# Altium PCB BeagleBone_Black_RevB4_V1.PcbDoc (part 2 of 2)
Units mm, origin at the board's own origin, x right, y up, seen from the top; angles counter-clockwise.
Board outline 100 x 101.6 mm, 4 copper layers (Top Layer, Layer 1, Layer 2, Bottom Layer), stack 0.603 mm thick; 71 components, 245 nets, 903 pads, 74 vias.
Unrouted connection lines stored in the file: 485.
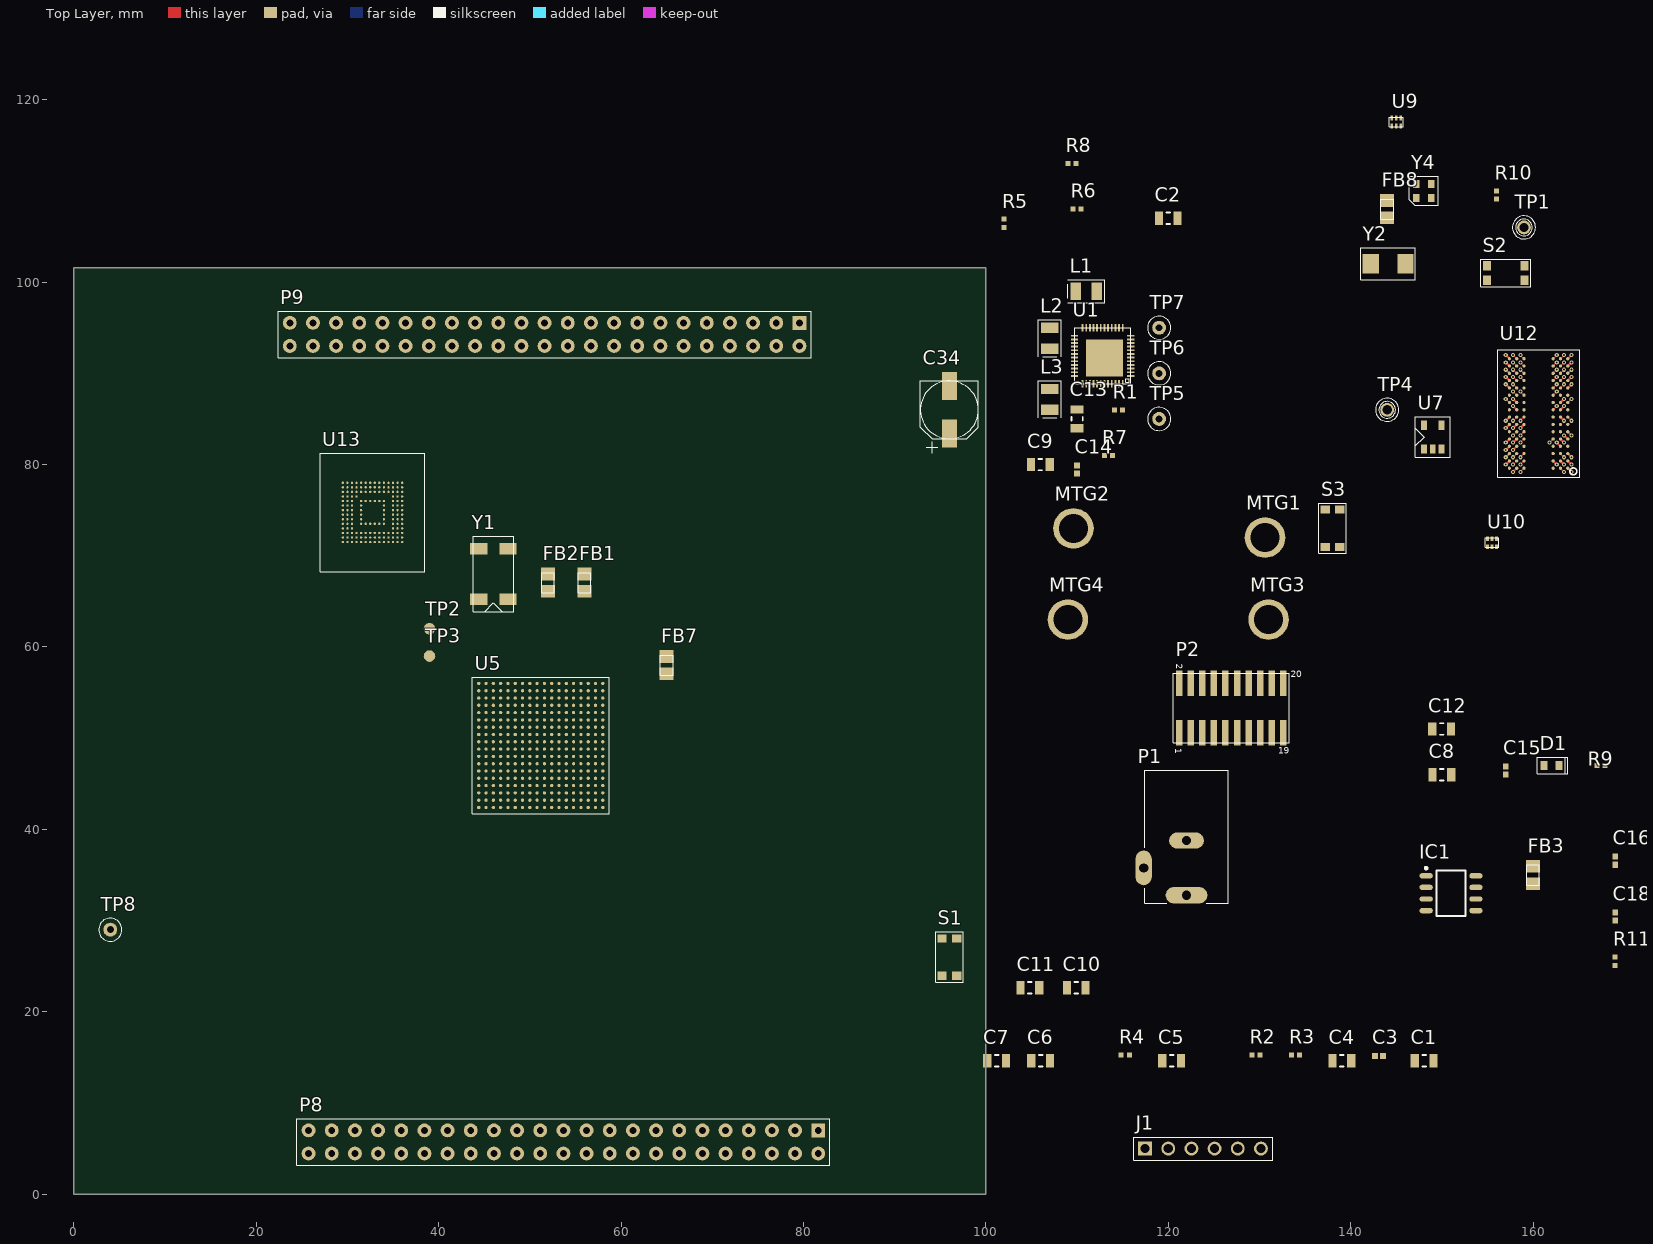
[diagram p0: Top Layer view]

## Part data (continued)
U1: library part PWR_TPS65217_2, "IC PMIC BATT PWR SYST 48VQFN", Current - Supply=-, Manufacturer="Texas Instruments", Manufacturer Part Number=TPS65217CRSLR, Operating Temperature="-40°C ~ 105°C", Package / Case="48-VFQFN Exposed Pad", Supplier Device Package="48-VQFN-EP (6x6)", Supplier Part Number 1=296-34814-6-ND, Voltage - Supply="2.75 V ~ 5.8 V", Applications="Battery Management, Display (LED Drivers), Handheld/Mobile Devices, Power Supply", Category="Integrated Circuits (ICs)", ComponentLink1Description=http://www.ti.com/lit/ds/symlink/tps65217c.pdf, ComponentLink1URL=http://www.ti.com/lit/ds/symlink/tps65217c.pdf, Mounting Type="Surface Mount", Packaging=Digi-Reel®, Pricing 1="1=8.01, 10=7.204, 25=6.5516, 100=4.1918, 250=4.11412, 500=4.0365, 750=3.95888 (USD)", RoHS="RoHS Compliant", Stock 1=0, Supplier 1=Digi-Key
U5: "SubArctic Cortex A8 Processor 15x15", Manufacturer="Texas Instruments", Manufacturer Part Number=XAM3359ZCZ, Mfr=TI, MfrNum="AM335x 15x15 FBGA ZCE", Package / Case=324-LFBGA, PartName=AM335X_15x15, Part Number=IC_AM335x_ZCE, Supplier Device Package=324-NFBGA(15x15), Supplier Part Number 1=296-35073-ND, TIIntPartnumber=1A0242, Voltage="1.06 V ~ 1.15 V", Category="Integrated Circuits (ICs)", ComponentLink1Description=http://www.ti.com/lit/ds/symlink/am3354.pdf, ComponentLink1URL=http://www.ti.com/lit/ds/symlink/am3354.pdf, Cost10K=10.00, Cost100=10.00, Features=-, Mounting Type="Surface Mount", Packaging=Tray, Pricing 1="1=33.5, 10=30.988, 100=26.465, 250=24.28752, 500=23.115, 1000=21.775, 2500=21.105, 5000=20.6025, 10000=20.1 (USD)", Processor Type="ARM Microprocessor", RoHS="RoHS Compliant", Speed=-, Stock 1=16, Supplier 1=Digi-Key, Vendor=Arrow
U7: "IC EEPROM 32KBIT 400KHZ SOT23-5", Manufacturer="Microchip Technology", Manufacturer Part Number=24LC32AT-I/OT, Operating Temperature="-40°C ~ 85°C", Package / Case="SC-74A, SOT-753", Supplier Device Package=SOT-23-5, Supplier Part Number 1=24LC32AT-I/OTDKR-ND, Voltage - Supply="2.5 V ~ 5.5 V", Category="Integrated Circuits (ICs)", ComponentLink1Description=http://ww1.microchip.com/downloads/en/DeviceDoc/21713M.pdf, ComponentLink1URL=http://ww1.microchip.com/downloads/en/DeviceDoc/21713M.pdf, Format - Memory="EEPROMs - Serial", Interface="I²C, 2-Wire Serial", Memory Size="32K (4K x 8)", Memory Type=EEPROM, Packaging=Digi-Reel®, Pricing 1="1=0.5, 10=0.32, 25=0.31, 100=0.3 (USD)", RoHS="RoHS Compliant", Speed=400kHz, Stock 1=8694, Supplier 1=Digi-Key
U9 U10: library part PROT_TPD4S012, "ESD 4channel USB Interface", Manufacturer="Texas Instruments", Manufacturer Part Number=TPD4S012DRYR, Mfr=TI, MfrNum=TPD4S012DRY, Package / Case=6-UFDFN, Power (Watts)=60W, Supplier Device Package="6-SON (1.45x1)", Supplier Part Number 1=296-24244-6-ND, TIIntPartnumber=1A0233, Voltage - Clamping=-, Applications=USB, Category="Circuit Protection", ComponentLink1Description=http://www.ti.com/lit/ds/symlink/tpd4s012.pdf, ComponentLink1URL=http://www.ti.com/lit/ds/symlink/tpd4s012.pdf, Cost10K=0.23, Cost100=0.76, Number of Circuits=4, Packaging=Digi-Reel®, PartName=TPD4S012, Pricing 1="1=0.78, 10=0.682, 25=0.6028, 100=0.2552, 250=0.25044, 500=0.2457, 750=0.24097 (USD)", RoHS="RoHS Compliant", Stock 1=7978, Supplier 1=Digi-Key, Technology="Mixed Technology", Vendor=Digikey, Voltage - Working=-
U12: library part MT41K256M16HA, "DDR2 SDRAM 2Gb (256Mx8)", Manufacturer="Micron Technology", Manufacturer Part Number=MT41K256M16HA-125:E, Package Quantity=1, Peak Solder Temperature="260 deg C", Supplier Part Number 1=52128708S9959891N2406, China ROHS Cadmium (X -> above / O -> below threshold)=O, China ROHS Hex Chromium (X -> above / O -> below threshold)=O, China ROHS Lead (X -> above / O -> below threshold)=O, China ROHS Mercury (X -> above / O -> below threshold)=O, China ROHS PBB (X -> above / O -> below threshold)=O, China ROHS PBDE (X -> above / O -> below threshold)=O, ComponentLink1Description=http://components.arrow.com/partservice/dataview/altium/52128708S9959891N2406?apiKey=aa438727d59eed98c4bed826d8d949c84cb5e685b92bf87346a0226bd2658797, ComponentLink1URL=http://components.arrow.com/partservice/dataview/altium/52128708S9959891N2406?apiKey=aa438727d59eed98c4bed826d8d949c84cb5e685b92bf87346a0226bd2658797, EU_ROHS_PROD_EXEMPTION_BY_SUPP=N/R, Lead Time="0 weeks", Pricing 1="0=10.09 (USD)", RoHS="CHINA ROHS: Compliant / EU ROHS: Compliant", Stock 1=0, Supplier 1=Arrow, Termination Finish=Sn/Ag/Cu
U13: library part eMMC, "Flash Card 2G-byte 3.3V MultiMedia Card 153-Pin WFBGA", Manufacturer="Micron Technology", Manufacturer Part Number="MTFC2GMVEA-0M WT", Package Quantity=1, Supplier Part Number 1=53710993S251949N2406, ComponentLink1Description=http://components.arrow.com/partservice/dataview/altium/53710993S251949N2406?apiKey=aa438727d59eed98c4bed826d8d949c84cb5e685b92bf87346a0226bd2658797, ComponentLink1URL=http://components.arrow.com/partservice/dataview/altium/53710993S251949N2406?apiKey=aa438727d59eed98c4bed826d8d949c84cb5e685b92bf87346a0226bd2658797, EU_ROHS_PROD_EXEMPTION_BY_SUPP=N/R, Lead Time="2 weeks", Pricing 1="0=7.21 (USD)", RoHS="CHINA ROHS: Compliant / EU ROHS: Compliant", Stock 1=1009, Supplier 1=Arrow
Y1: library part CRYS_32_768KHz_SMD32, "CRYSTAL 32.768KHZ 12.5PF SMD", ESR (Equivalent Series Resistance)="50 kOhm", Frequency Stability=-, Frequency Tolerance=±30ppm, Load Capacitance=12.5pF, Manufacturer="Citizen Finetech Miyota", Manufacturer Part Number=CM200C-32.768KAZF-UT, Operating Mode=Fundamental, Operating Temperature="-40°C ~ 85°C", Package / Case="4-SOJ, 5.50mm pitch", Supplier Part Number 1=300-8738-6-ND, Category="Crystals and Oscillators", ComponentLink1Description=http://cfm.citizen.co.jp/english/product/pdf/CM200C_250C.pdf, ComponentLink1URL=http://cfm.citizen.co.jp/english/product/pdf/CM200C_250C.pdf, Frequency=32.768kHz, Height="0.098\" (2.50mm)", Mounting Type="Surface Mount", Packaging=Digi-Reel®, Pricing 1="1=0.75, 10=0.65, 50=0.57, 100=0.45, 500=0.38, 1000=0.3 (USD)", Ratings=-, RoHS="RoHS Compliant", Size / Dimension="0.311\" L x 0.146\" W (7.90mm x 3.70mm)", Stock 1=0, Supplier 1=Digi-Key, Type="kHz Crystal (Tuning Fork)"
Y2: library part CRYS_24MHz_SCC, "CRYSTAL 24.000MHZ 18PF SMD", ESR (Equivalent Series Resistance)="50 Ohm", Frequency Stability=±30ppm, Load Capacitance=18pF, Manufacturer="TXC CORPORATION", Manufacturer Part Number=7A-24.000MAAJ-T, Operating Mode=Fundamental, Operating Temperature="-20°C ~ 70°C", Package / Case=2-SMD, Ratings=-, Supplier Part Number 1=887-1090-6-ND, Category="Crystals and Oscillators", ComponentLink1Description=http://www.txccrystal.com/images/pdf/7a.pdf, ComponentLink1URL=http://www.txccrystal.com/images/pdf/7a.pdf, Frequency=24MHz, Frequency Tolerance=±30ppm, Height="0.053\" (1.35mm)", Mounting Type="Surface Mount", Packaging=Digi-Reel®, Pricing 1="1=0.79, 10=0.658, 50=0.59, 100=0.525, 500=0.5 (USD)", RoHS="RoHS Compliant", Size / Dimension="0.197\" L x 0.126\" W (5.00mm x 3.20mm)", Stock 1=2524, Supplier 1=Digi-Key, Type="MHz Crystal"
Y4: library part ASDMB, Current - Supply (Disable) (Max)=15µA, Current - Supply (Max)=16mA, Frequency Stability=±50ppm, Manufacturer="Abracon Corporation", Manufacturer Part Number=ASDMB-24.576MHZ-LC-T, Operating Temperature="-40°C ~ 85°C", Package / Case="4-SMD, No Lead (DFN, LCC)", Ratings=-, Supplier Part Number 1=535-11729-6-ND, Voltage - Supply="1.8 V ~ 3.3 V", Category="Crystals and Oscillators", ComponentLink1Description=http://www.abracon.com/Oscillators/ASDMB.pdf, ComponentLink1URL=http://www.abracon.com/Oscillators/ASDMB.pdf, Frequency=24.576MHz, Function="Standby (Power Down)", Height="0.035\" (0.90mm)", Mounting Type="Surface Mount", Output=CMOS, Packaging=Digi-Reel®, Pricing 1="1=1.69, 10=1.463, 50=1.2826, 100=1.0125, 500=0.855 (USD)", RoHS="RoHS Compliant", Size / Dimension="0.098\" L x 0.079\" W (2.50mm x 2.00mm)", Stock 1=0, Supplier 1=Digi-Key, Type="MEMS (Silicon)"

## Via types
v1: diameter 0.457, hole 0.203, Top Layer to Bottom Layer, tented both sides, 74 vias

## Nets (pads, with @x,y where several pads share a name; then routed paths per layer and width w, separated by ;. In a path a pad name is that pad's centre, name@x,y a point inside that pad or via, vN(x,y) a via of type N, cw(c..) or ccw(c..) an arc to the next point about the centre after c; other vN are vias at no path point)
12M_LOOP: 
12MHZ: 
AIN0: C1.2 C2.2 C3.2 C4.2 C5.1 C6.1 C7.2 C8.2 C9.1 C10.2 C11.1 C12.2 C13.1 C14.1 C15.1 C16.2 C18.2 C34.2 FB3.1 FB3.2 IC1.5 IC1.6 IC1.7 IC1.8 J1.1 P2.4 P2.8 P2.10 P2.12 P2.16 P2.20 P4.5 P8.1 P8.2 P9.2 P9.30 P9.34 P9.38 P9.40 P9.44 P9.46 P10.6 P10.9 R9.2 R10.1 S1.1 S1.3 S2.2 S2.4 S3.1 S3.3 TP1.1 TP8.1 U1.30 U1.41 U1.49 U5.A1 U5.A7 U5.A8 U5.A9 U5.A18 U5.B6 U5.B7 U5.B13 U5.C7 U5.C8 U5.D12 U5.E8 U5.F8 U5.G8 U5.G9 U5.G11 U5.G12 U5.H6 U5.H7 U5.H8 U5.H9 U5.H10 U5.H12 U5.J6 U5.J7 U5.J8 U5.J9 U5.J10 U5.J11 U5.K7 U5.K9 U5.K10 U5.K11 U5.L10 U5.L11 U5.L12 U5.L13 U5.M6 U5.M7 U5.M8 U5.M9 U5.M10 U5.M12 U5.M14 U5.N7 U5.N10 U5.N11 U5.N14 U5.V1 U5.V18 U7.2 U9.4 U10.4 U12.A9 U12.B1 U12.B3 U12.B9 U12.D1 U12.D8 U12.E1 U12.E2 U12.E8 U12.F9 U12.G1 U12.G8 U12.G9 U12.J2 U12.J8 U12.M1 U12.M9 U12.P1 U12.P9 U12.T1 U12.T9 U13.C4 U13.E7 U13.G5 U13.H10 U13.K8 U13.N2 U13.N5 U13.P4 U13.P6 Y4.2
  other v1: 157,80 162.6,80 164.201,80 157.8,81.6 157.8,82.4 163.401,82.4 163.401,83.2 157,84 157.8,84 157.8,86.401 163.401,86.401 157,88.801 164.201,88.801 157,90.401 164.201,90.401 157,92.001 164.201,92.001
AIN5: P9.36 U5.B8
AIN7: U5.C9
B_UART0_RX: J1.4
B_UART0_TX: J1.5
CAP_VBB_MPU: U5.C10
CAP_VDD_SRAM_CORE: U5.D9
CAP_VDD_SRAM_MPU: U5.D11
CLKOUT2: P2.18 P9.42 R2.1 R3.1 U1.27 U1.28 U5.C16 U5.C17 U7.1 U7.3
CLKOUT_SRC: U5.D14
DDR_A0: U5.F3 U12.N3
  other v1: 162.6,89.601
DDR_A1: U5.H1 U12.P7
  other v1: 158.6,90.401
DDR_A2: U5.E4 U12.P3
  other v1: 162.6,90.401
DDR_A3: U5.C3 U12.N2
  other v1: 163.401,89.601
DDR_A4: U5.C2 U12.P8
  other v1: 157.8,90.401
DDR_A5: U5.B1 U12.P2
  other v1: 163.401,90.401
DDR_A6: U5.D5 U12.R8
  other v1: 157.8,91.201
DDR_A7: U5.E2 U12.R2
  other v1: 163.401,91.201
DDR_A8: U5.D4 U12.T8
  other v1: 157.8,92.001
DDR_A9: U5.C1 U12.R3
  other v1: 162.6,91.201
DDR_A10: U5.F4 U12.L7
  other v1: 158.6,88.001
DDR_A11: U5.F2 U12.R7
  other v1: 158.6,91.201
DDR_A12: U5.E3 U12.N7
  other v1: 158.6,89.601
DDR_A13: U5.H3 U12.T3
  other v1: 162.6,92.001
DDR_A14: U5.H4 U12.T7
  other v1: 158.6,92.001
DDR_A15: U5.D3 U12.M7
DDR_BA0: U5.C4 U12.M2
  other v1: 163.401,88.801
DDR_BA1: U5.E1 U12.N8
  other v1: 157.8,89.601
DDR_BA2: U5.B3 U12.M3
  other v1: 162.6,88.801
DDR_CASn: U5.F1 U12.K3
DDR_CKE: U5.G3 U12.K9
  other v1: 157,87.201
DDR_CLK: U5.D2 U12.J7
DDR_CLKn: U5.D1 U12.K7
DDR_CSn: U5.H2 U12.L2
DDR_D0: U5.M3 U12.E3
  other v1: 161.8,82.4
DDR_D1: U5.M4 U12.F7
  other v1: 158.6,83.2
DDR_D2: U5.N1 U12.F2
DDR_D3: U5.N2 U12.F8
  other v1: 157.8,83.2
DDR_D4: U5.N3 U12.H3
DDR_D5: U5.N4 U12.H8
  other v1: 157.8,84.8
DDR_D6: U5.P3 U12.G2
DDR_D7: U5.P4 U12.H7
  other v1: 158.6,84.8
DDR_D8: U5.J1 U12.D7
DDR_D9: U5.K1 U12.C3
DDR_D10: U5.K2 U12.C8
  other v1: 157.8,80.8
DDR_D11: U5.K3 U12.C2
  other v1: 163.401,80.8
DDR_D12: U5.K4 U12.A7
  other v1: 158.6,79.2
DDR_D13: U5.L3 U12.A2
  other v1: 163.401,79.2
DDR_D14: U5.L4 U12.B8
  other v1: 157.8,80
DDR_D15: U5.M1 U12.A3
DDR_DQM0: U5.M2 U12.E7
  other v1: 158.6,82.4
DDR_DQM1: U5.J2 U12.D3
DDR_DQS0: U5.P1 U12.F3
DDR_DQS1: U5.L1 U12.C7
  other v1: 158.6,80.8
DDR_DQSN0: U5.P2 U12.G3
DDR_DQSN1: U5.L2 U12.B7
  other v1: 158.6,80
DDR_ODT: U5.G1 U12.K1
  other v1: 164.201,87.201
DDR_RASn: U5.G4 U12.J3
  other v1: 162.6,86.401
DDR_RESETn: U5.G2 U12.T2
  other v1: 163.401,92.001
DDR_VREF: U5.J4 U12.H1 U12.M8
  other v1: 164.201,84.8 157.8,88.801
DDR_VTP: U5.J3
DDR_WEn: U5.B2 U12.L3
  other v1: 162.6,88.001
EHRPWM1A: P9.14 U5.U14 U5.U17
EHRPWM1B: P9.12 P9.16 U5.T14 U5.T17 U5.U18
EHRPWM2A: P8.19 U5.U10
EHRPWM2B: P8.13 U5.T10
eMMC_RSTn: U13.K5
eMMC_VCCI: U13.C2
ENZ_KALDO_1P8V: U5.B4
GND_EARTH: MTG1.1 MTG2.1 MTG3.1 MTG4.1 P4.6 P4.7 P4.8 P4.9 P10.11 P10.12 P10.13 P10.14 P10.15 P10.16
GND_OSC0: U5.V11
GND_OSC1: U5.A5
GPIO0_7SRC: U5.C18
GPIO0_26: P8.14 U5.T11
GPIO0_27: P8.17 U5.U12
GPIO1_12: P8.12 U5.T12
GPIO1_13: P8.11 U5.R12
GPIO1_14: P8.16 U5.V13
GPIO1_15: P8.15 U5.U13
GPIO1_17: P9.24 U5.D15 U5.V14
GPIO1_29: P8.26 U5.V6
GPIO2_1: P8.18 U5.V12
GPIO3_18: U5.B12
GPIO3_19: P9.28 U5.C12 U5.C13
GPIO3_20: U5.D13
GPIO3_21: P9.26 U5.A14 U5.D16
HDMI_INT: U5.U16
HDMICLK_DISn: U5.V17 Y4.1
I2C1_SCL: P2.15 P9.10 P9.18 S1.2 S1.4 U1.25 U5.A10 U5.A16 U5.B16
I2C2_SCL: P9.20 U5.D17 U5.D18
JTAG_EMU0: P2.13 U5.C14
JTAG_EMU1: P2.14 U5.B14
JTAG_TCK: P2.9 P2.11 U5.A12
JTAG_TDI: P2.3 U5.B11
JTAG_TDO: P2.7 U5.A11
JTAG_TMS: P2.1 U5.C11
JTAG_TRSTn: P2.2 U5.B10
LCD_DATA0: P8.45 U5.R1
LCD_DATA1: P8.46 U5.R2
LCD_DATA2: P8.43 U5.R3
LCD_DATA3: P8.44 U5.R4
LCD_DATA4: P8.41 U5.T1
LCD_DATA5: P8.42 U5.T2
LCD_DATA6: P8.39 U5.T3
LCD_DATA7: P8.40 U5.T4
LCD_DATA8: P8.37 U5.U1
LCD_DATA9: P8.38 U5.U2
LCD_DATA10: P8.36 U5.U3
LCD_DATA11: P8.34 U5.U4
LCD_DATA12: P8.35 U5.V2
LCD_DATA13: P8.33 U5.V3
LCD_DATA14: P8.31 U5.V4
LCD_DATA15: P8.32 U5.T5
LCD_DE: P8.30
LCD_HSYNC: P8.29
LCD_PCLK: P8.28
LCD_VSYNC: P8.27
LCDDE: U5.R6
LCDPCLK: U5.V5
LCDVHYNC: U5.R5
LCDVSYNC: U5.U5
LDO_PGOOD: U1.46 U5.B5
MDIO_CLK: U5.M18
MDIO_DATA: U5.M17
MII1_COL: U5.H16
MII1_CRS_DV: U5.H17
MII1_REFCLK: 
MII1_RXCLK: U5.L18
MII1_RXD0: U5.M16
MII1_RXD1: U5.L15
MII1_RXD2: U5.L16
MII1_RXD3: U5.L17
MII1_RXDV: U5.J17
MII1_RXERR: U5.J15
MII1_TXCLK: U5.K18
MII1_TXD0: U5.K17
MII1_TXD1: U5.K16
MII1_TXD2: U5.K15
MII1_TXD3: U5.J18
MII1_TXEN: U5.J16
MMC0_CD: P2.19 P10.10 U5.C15
MMC0_CLKO: P10.5 U5.G17
MMC0_CMD: P10.3 U5.G18
MMC0_DAT0: P10.7 U5.G16
MMC0_DAT1: P10.8 U5.G15
MMC0_DAT2: P10.1 U5.F18
MMC0_DAT3: P10.2 U5.F17
MMC1_CLK: P8.21 U5.U9 U13.M6
MMC1_CMD: P8.20 U5.V9 U13.M5
MMC1_DAT0: P8.25 U5.U7 U13.A3
MMC1_DAT1: P8.24 U5.V7 U13.A4
MMC1_DAT2: P8.5 U5.R8 U13.A5
MMC1_DAT3: P8.6 U5.T8 U13.B2
MMC1_DAT4: P8.23 U5.U8 U13.B3
MMC1_DAT5: P8.22 U5.V8 U13.B4
MMC1_DAT6: P8.3 U5.R9 U13.B5
MMC1_DAT7: P8.4 U5.T9 U13.B6
NetC17_1: IC1.4 R10.2 R11.1
NetR21_1: 
NetR75_2: S2.1 S2.3
NetR159_2: U5.P15
NetR162_1: 
NetR167_1: Y4.3
NetTP5_1: TP5.1 U1.4 U1.5
NetTP6_1: TP6.1 U1.6
NetTP7_1: TP7.1 U1.11
NetU3_2: U5.R14
OSC0_IN: U5.V10 Y2.2
OSC0_OUT: U5.U11 Y2.1
OSC1_IN: U5.A6 Y1.1
OSC1_OUT: U5.A4 Y1.4
P_BYPASS: C4.1 U1.47
P_INT_LDO: C3.1 U1.48
P_L1: L1.1 U1.20
P_L2: L2.1 U1.23
P_L3: L3.1 U1.31
PMIC_INT: R1.1 U1.45 U5.B18
PMIC_PGOOD: U1.26 U5.B15
PMIC_POWR_EN: U1.9 U5.C6
PROC_A15: U5.A15
PWR_BUT: S3.2 S3.4
PWR_LEDR: D1.1 R9.1
SPI1_SCLK: FB2.1 P9.32 U5.A13 U5.D8
SYS_5V: C34.1 P9.8
SYS_5V_err: C7.1 C8.1 C10.1 C12.1 C16.1 IC1.2 U1.2 U1.7 U1.8 U1.21 U1.22 U1.32 U1.39 U1.42
TESTOUT: TP3.1 U5.A3
TIMER4: P8.7 U5.R7
TIMER5: P8.9 U5.T6
TIMER6: P8.10 U5.U6
TIMER7: P8.8 U5.T7
U5_H18: U5.H18
U5_R13: U5.R13
U5_T13: U5.T13
UART0_RX: U5.E15
UART0_TX: U5.E16
UART2_RXD: P9.22 U5.A17 U5.B17
USB0_DM: P4.2 U5.N18 U10.2
USB0_DP: P4.3 U5.N17 U10.1
USB0_ID: P4.4 U5.P16 U10.3
USB1_DM: U5.R18 U9.2
USB1_DP: U5.R17 U9.1
USB1_DRVVBUS: U5.F15
USB1_ID: U5.P17
USB1_OCn: U5.T16
USB1_PWR: FB7.1 FB8.2 U9.6
USB1_VBUS: FB8.1 U5.T18
USB_DC: P4.1 U10.6
USB_DC_err: C2.1 U1.12
USR0: U5.V15
USR1: U5.U15
USR2: U5.T15
USR3: U5.V16
VBUS: FB7.2
VDCDC1: L1.2 R4.1 U1.19
VDCDC2: C6.2 L2.2 U1.24
VDCDC3: C9.2 L3.2 U1.29
VDD_1V8: FB1.1 FB2.2 U5.D10 U5.E9 U5.N16 U5.R16
VDD_1V8_err: C11.2 R5.1 U1.40
VDD_3V3A: U5.E10 U5.E11 U5.E12 U5.E13 U5.F14 U5.G14 U5.H14 U5.J14 U5.K14 U5.L14 U5.N5 U5.N15 U5.P5 U5.P6 U5.P7 U5.P8 U5.P10 U5.P11 U5.P12 U5.P13 U5.R15 U7.4 Y4.4
VDD_3V3A_err: C13.2 R1.2 R2.2 R3.2 U1.43
VDD_3V3AUX: C15.2 D1.2 IC1.1 U1.1
VDD_3V3B: P2.5 P9.4 P10.4 U13.C6 U13.E6 U13.F5 U13.J10 U13.K9 U13.M4 U13.N4 U13.P3 U13.P5
VDD_3V3B_err: C18.1 IC1.3 R11.2
VDD_5V: P9.6
VDD_5V_err: C1.1 P1.1 U1.10
VDD_CORE: U5.F6 U5.F7 U5.G6 U5.G7 U5.G10 U5.H11 U5.J12 U5.K6 U5.K8 U5.K12 U5.L6 U5.L7 U5.L8 U5.L9 U5.M11 U5.M13 U5.N8 U5.N9 U5.N12 U5.N13
VDD_MPU: U5.F10 U5.F11 U5.F12 U5.F13 U5.G13 U5.H13 U5.J13
VDD_MPUON: TP2.1 U5.A2
VDD_PLL: FB1.2 U5.E7 U5.H15 U5.R10 U5.R11
VDD_RTC: U5.D6
VDDS: U5.E6 U5.E14 U5.F9 U5.K13 U5.N6 U5.P9 U5.P14
VDDS_DDR: U5.E5 U5.F5 U5.G5 U5.H5 U5.J5 U5.K5 U5.L5 U12.A1 U12.A8 U12.B2 U12.C1 U12.C9 U12.D2 U12.D9 U12.E9 U12.F1 U12.G7 U12.H2 U12.H9 U12.K2 U12.K8 U12.N1 U12.N9 U12.R1 U12.R9
  other v1: 157.8,79.2 164.201,79.2 163.401,80 157,80.8 164.201,80.8 157,81.6 157,82.4 162.6,82.4 164.201,83.2 158.6,84 157,84.8 163.401,84.8 157.8,87.201 163.401,87.201 157,89.601 164.201,89.601 157,91.201 164.201,91.201
VDDS_DDR_err: C5.2 R4.2
VDDS_err: R5.2 R8.2
VIO: R6.2 U1.18
VLDO1: R6.1 R7.1 R8.1 U1.3
VREFP_ADC: U5.B9
VRTC: U5.D7
VRTC_err: C14.2 R7.2
WAKEUP: U1.13 U5.C5
WP: TP4.1 U7.5
XDMA_EVENT_INTR0: P2.17
ZQ: U12.L8
  other v1: 157.8,88.001
pads on no net: J1.2 J1.3 J1.6 P1.2 P1.3 P2.6 P9.1 P9.3 P9.5 P9.7 P9.9 P9.11 P9.13 P9.15 P9.17 P9.19 P9.21 P9.23 P9.25 P9.27 P9.29 P9.31 P9.33 P9.35 P9.37 P9.39 P9.41 P9.43 P9.45 U1.14 U1.15 U1.16 U1.17 U1.33 U1.34 U1.35 U1.36 U1.37 U1.38 U1.44 U5.E17 U5.E18 U5.F16 U5.M5 U5.M15 U5.P18 U9.3 U9.5 U10.5 U12.J1 U12.J9 U12.L1 U12.L9 U13.A1 U13.A2 U13.A6 U13.A7 U13.A8 U13.A9 U13.A10 U13.A11 U13.A12 U13.A13 U13.A14 U13.B1 U13.B7 U13.B8 U13.B9 U13.B10 U13.B11 U13.B12 U13.B13 U13.B14 U13.C1 U13.C3 U13.C5 U13.C7 U13.C8 U13.C9 U13.C10 U13.C11 U13.C12 U13.C13 U13.C14 U13.D1 U13.D2 U13.D3 U13.D4 U13.D12 U13.D13 U13.D14 U13.E1 U13.E2 U13.E3 U13.E5 U13.E8 U13.E9 U13.E10 U13.E12 U13.E13 U13.E14 U13.F1 U13.F2 U13.F3 U13.F10 U13.F12 U13.F13 U13.F14 U13.G1 U13.G2 U13.G3 U13.G10 U13.G12 U13.G13 U13.G14 U13.H1 U13.H2 U13.H3 U13.H5 U13.H12 U13.H13 U13.H14 U13.J1 U13.J2 U13.J3 U13.J5 U13.J12 U13.J13 U13.J14 U13.K1 U13.K2 U13.K3 U13.K6 U13.K7 U13.K10 U13.K12 U13.K13 U13.K14 U13.L1 U13.L2 U13.L3 U13.L12 U13.L13 U13.L14 U13.M1 U13.M2 U13.M3 U13.M7 U13.M8 U13.M9 U13.M10 U13.M11 U13.M12 U13.M13 U13.M14 U13.N1 U13.N3 U13.N6 U13.N7 U13.N8 U13.N9 U13.N10 U13.N11 U13.N12 U13.N13 U13.N14 U13.P1 U13.P2 U13.P7 U13.P8 U13.P9 U13.P10 U13.P11 U13.P12 U13.P13 U13.P14 Y1.2 Y1.3

## Polygon pours and split planes (outlines as drawn)
no net on Layer 1 (split plane): 99.49,0.51 0.51,0.51 0.51,101.09 99.49,101.09
no net on Layer 2 (split plane): 99.49,0.51 0.51,0.51 0.51,101.09 99.49,101.09

## Text inside footprints (layer, text, board x,y; h text height)
P2: Top Overlay "20" at 133.445,56.66 h0.71; Top Overlay "19" at 132.048,48.278 h0.71; Top Overlay "2" at 120.872,58.184 h0.71 r270; Top Overlay "1" at 120.745,48.913 h0.71 r270